# EAGLE board The project (EAGLE 7.6.0)

Size 56.82 x 53.33 mm. Coordinates in mm from the lower left corner, seen from the top.
Outline: 0,0 56.82,0 56.82,53.33 0,53.33 0,0
Copper layers (1*16): Top 0.035mm / dielectric 1.5mm / Bottom 0.035mm
Design rules "default": minimum track width 10mil, minimum drill 24mil, track to track 8mil, track to pad 8mil, pad to pad 8mil, via to via 8mil, smd to smd 8mil, copper to edge 40mil, drill to drill 8mil, minimum pad ring 10mil, minimum via ring 8mil, stop-mask expansion 4mil, vias tented up to drill 0mil, thermal gap 10mil

## Footprints (pad centres in the part's own frame; a part is rotated, then mirrored left to right if it is on the bottom)
DC-POWER = drill 0.889 pad 2.54 octagon: + 0,2.54; - 0,-2.54
2P-2.54-65/35MIL = drill 0.889 pad 1.651 square: 1 0,1.27 | drill 0.889 pad 1.651: 2 0,-1.27
0207/10 = drill 0.813 octagon: 1 -5.08,0; 2 5.08,0
TL1105 = drill 1 pad 1.676: 1 -2.25,3.25; 2 2.25,3.25; 3 -2.25,-3.25; 4 2.25,-3.25
TO220 = drill 1.118 long: 1 -2.54,-6.35; 2 0,-6.35; 3 2.54,-6.35 | hole 3.302: 0,11.176

## Placement (x,y rotation side)
BAT1  [DC-POWER]  5,60.88 0 top  (outside the outline)
M1  [2P-2.54-65/35MIL]  5,98.98 0 top  (outside the outline)
R1  1k‎Ω  [0207/10]  5,73.58 0 top  (outside the outline)
R2  1k‎Ω  [0207/10]  5,86.28 0 top  (outside the outline)
S1  [TL1105]  5,111.68 0 top  (outside the outline)
S2  [TL1105]  5,124.38 0 top  (outside the outline)
T1  [TO220]  5,10.08 0 top
T3  [TO220]  5,22.78 0 top
T4  [TO220]  5,35.48 0 top
T5  [TO220]  5,48.18 0 top

## Library data of the parts
BAT1 M1 R1 R2 S1 S2 T1 T3-T5 = AUTODESK_CIRCUITS_BREADBOARD

## Nets
N$1: BAT1.+ R1.2 R2.2 T1.3 T3.3
N$2: R2.1 S2.2 T1.1 T4.1
N$3: M1.1 T1.2 T4.2
N$4: R1.1 S1.2 T3.1 T5.1
N$5: M1.2 T3.2 T5.2
N$6: BAT1.- S1.3 S2.3 T4.3 T5.3

## Tracks (layer width: path | path; a pad name or v marks a point on that pad's centre or on a via)
N$1  (4 unrouted)
N$2  (3 unrouted)
N$3  (2 unrouted)
N$4  (3 unrouted)
N$5  (2 unrouted)
N$6  (4 unrouted)